# Altium PCB main.PcbDoc (part 6 of 16)
Units mil, origin at the board's own origin, x right, y up, seen from the top; angles counter-clockwise.
Board outline 8394.75 x 5164.44 mil, 7 copper layers (Top Layer 1, Layer 2, Layer 3, Unused, Layer 4_pow, Layer 5_gnd, Bottom 6+gnd), stack 64.043 mil thick; 364 components, 409 nets, 1932 pads, 1061 vias.
Unrouted connection lines stored in the file: 2.
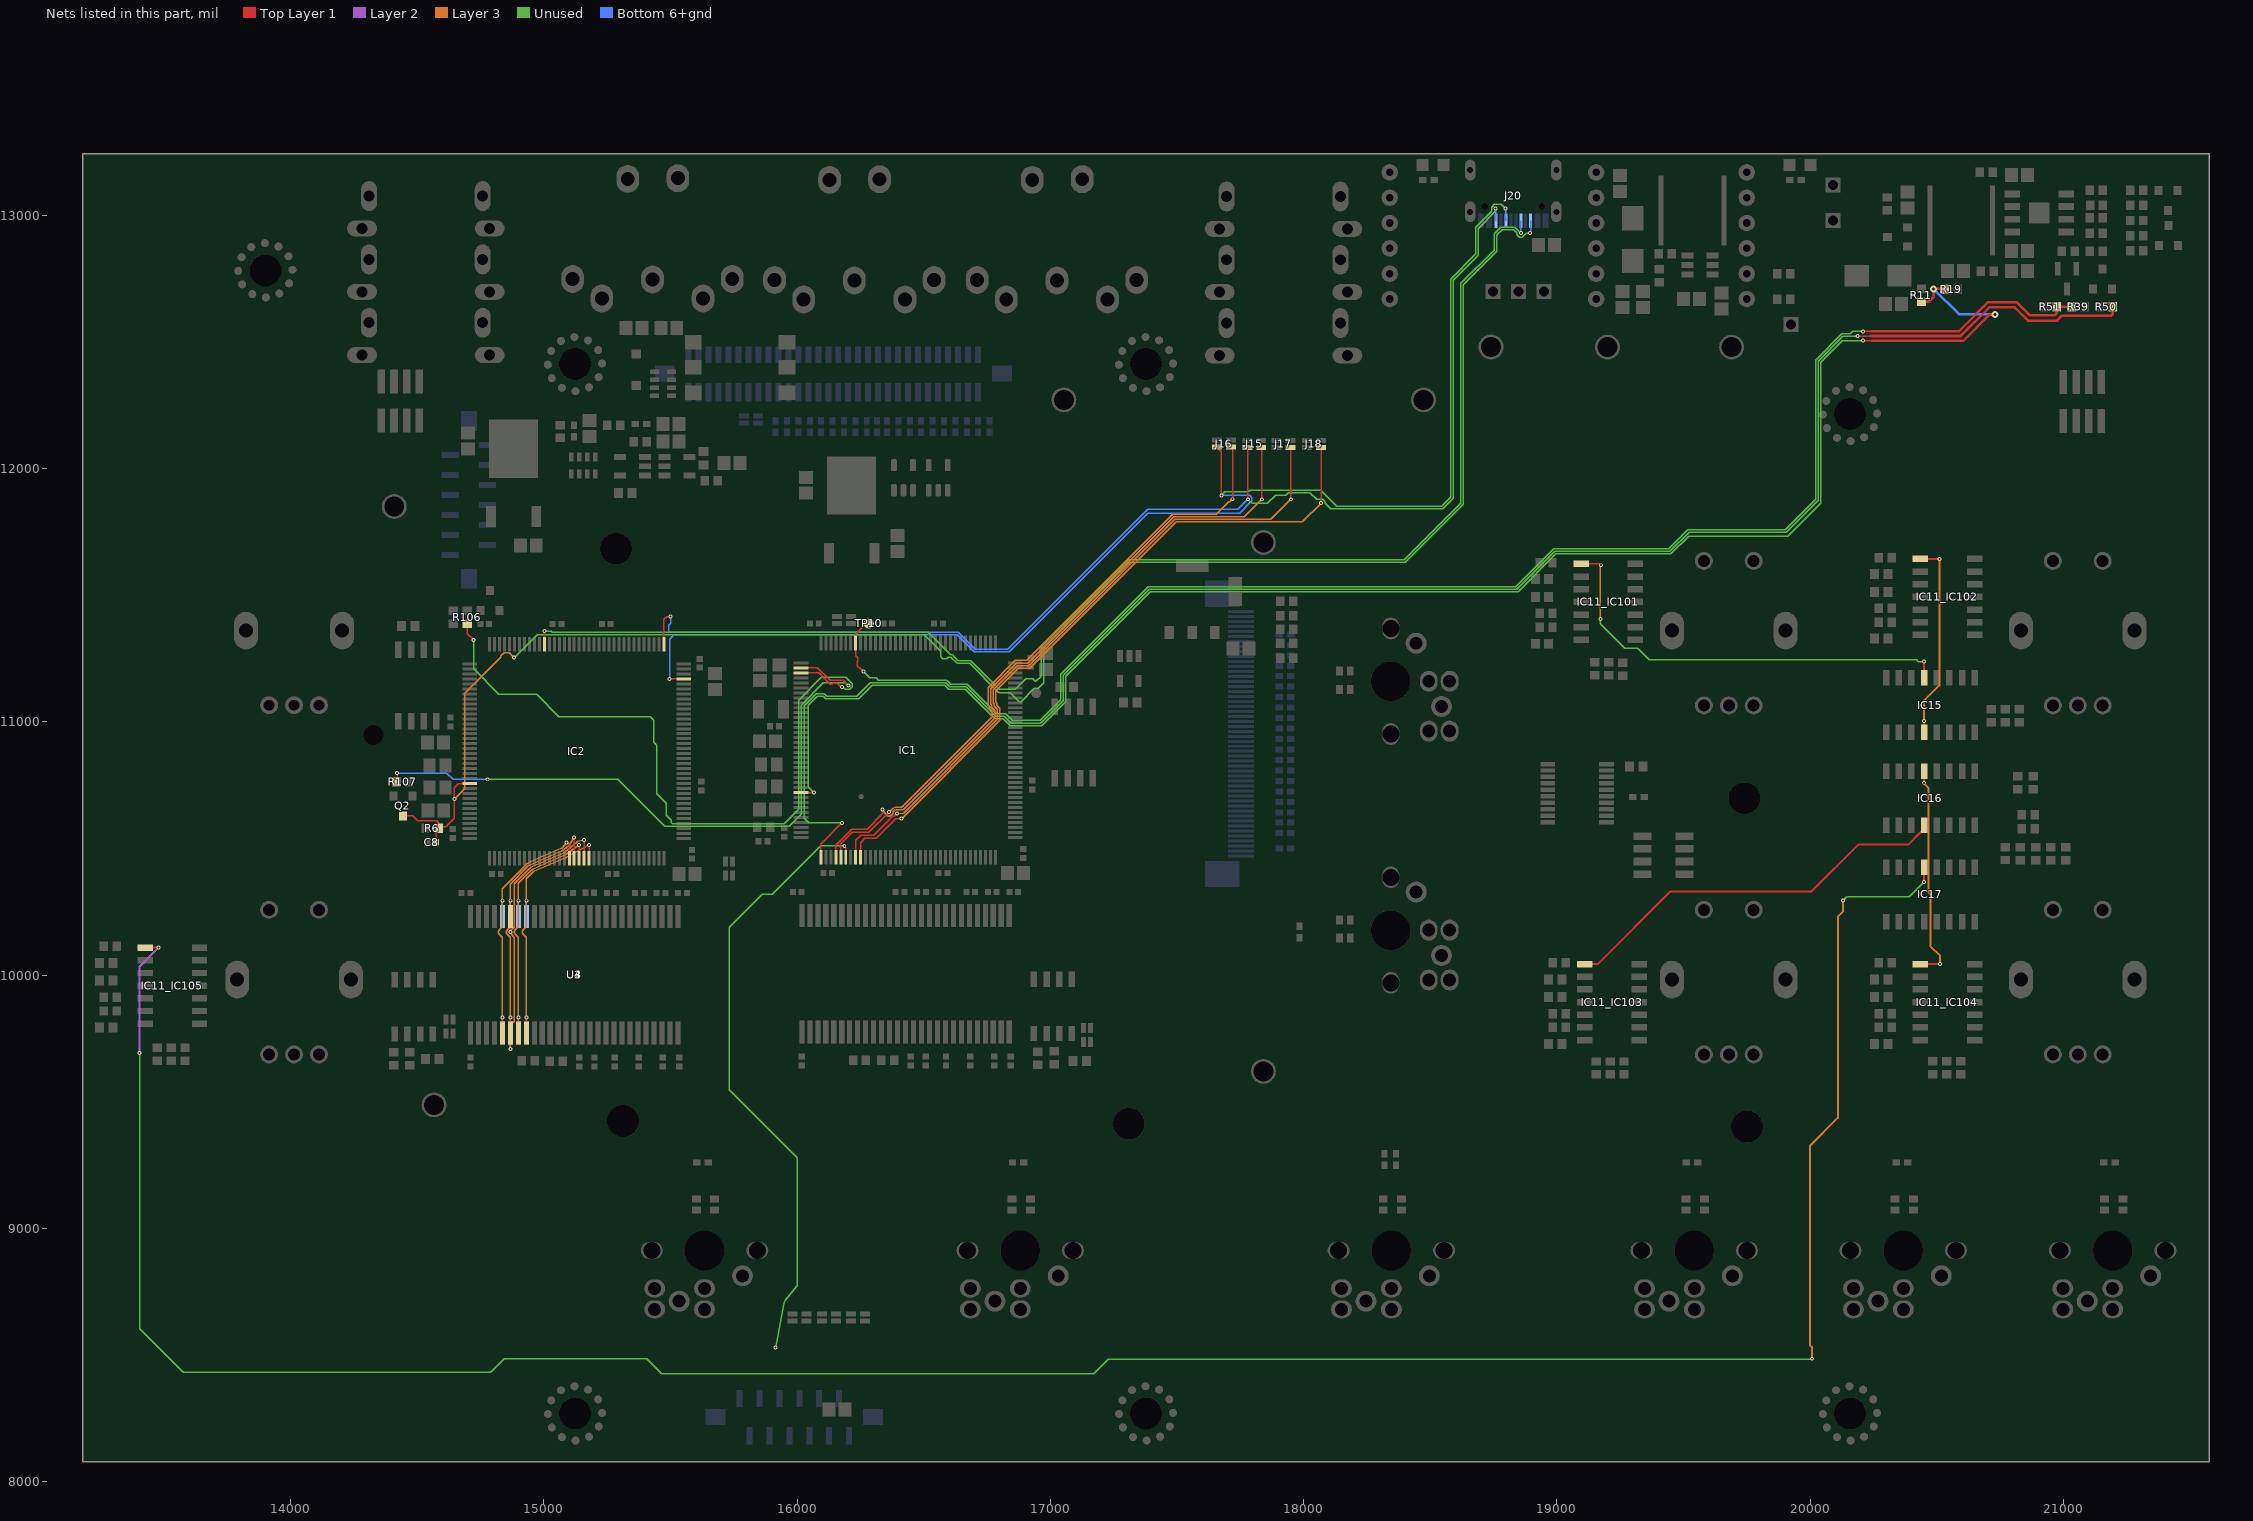
[diagram p9: the nets of this part, all layers, seen from the top]

## Via types
v1: diameter 15.75, hole 7.87, Top Layer 1 to Bottom 6+gnd, tented both sides, 961 vias
v2: diameter 27.56, hole 11.81, Top Layer 1 to Bottom 6+gnd, 45 vias
v3: diameter 23.62/23.62/23.62/23.62/23.62/23.62/23.62 (per signal layer), hole 12, Top Layer 1 to Bottom 6+gnd, tented top, 42 vias
v4: diameter 15.75, hole 7.87, Top Layer 1 to Bottom 6+gnd, 10 vias
v5: diameter 23.62/23.62/23.62/23.62/23.62/23.62/23.62 (per signal layer), hole 12, Top Layer 1 to Bottom 6+gnd, tented bottom, 3 vias

## Nets (pads, with @x,y where several pads share a name; then routed paths per layer and width w, separated by ;. In a path a pad name is that pad's centre, name@x,y a point inside that pad or via, vN(x,y) a via of type N, cw(c..) or ccw(c..) an arc to the next point about the centre after c; other vN are vias at no path point) (continued)
AA7: IC2.53 U3.32 U4.32 | length 1309.9
  Top Layer 1 w5: U3.32@14836.39,9771.46 v1@14836.39,9833.49 ; v1(15089.85,10524.63) 15100.09,10514.39 15100.09,10462.11 IC2.53@15100.32,10461.87
  Layer 3 w5: v1(14836.63,9833.49) 14836.63,10145.64 ; 14836.63,10195.56 14836.63,10293.63 v1(14836.14,10294.12) 14836.14,10340.73 ; v1(15089.85,10524.63) 15073.95,10504.96 ; 14835.17,10149.12 cw(c14831.63,10145.59) 14836.63,10145.68 ; 14835.17,10149.12 cw(c14831.63,10145.59) 14836.63,10145.68 ; 14835.17,10149.12 cw(c14831.63,10145.59) 14836.63,10145.68 ; 14835.17,10149.12 cw(c14831.63,10145.59) 14836.63,10145.68 ; 14835.17,10149.12 cw(c14831.63,10145.59) 14836.63,10145.68 ; 14835.17,10149.12 cw(c14831.63,10145.59) 14836.63,10145.68 ; 14835.17,10149.12 cw(c14831.63,10145.59) 14836.63,10145.68 ; 14835.17,10149.12 cw(c14831.63,10145.59) 14836.63,10145.68 ; 14835.17,10149.12 cw(c14831.63,10145.59) 14836.63,10145.68 ; 14835.17,10149.12 cw(c14831.63,10145.59) 14836.63,10145.68 ; 14835.17,10149.12 cw(c14831.63,10145.59) 14836.63,10145.68 ; 14835.17,10149.12 cw(c14831.63,10145.59) 14836.63,10145.68 ; 14835.17,10149.12 cw(c14831.63,10145.59) 14836.63,10145.68 ; 14835.17,10149.12 cw(c14831.63,10145.59) 14836.63,10145.68 ; 14835.17,10149.12 cw(c14831.63,10145.59) 14836.63,10145.68 ; 14835.17,10149.12 cw(c14831.63,10145.59) 14836.63,10145.68 ; 14835.17,10149.12 14825.25,10159.1 cw(c14836.14,10169.94) 14824.62,10180.12 14835.38,10192.29 ; 14835.38,10192.29 ccw(c14831.63,10195.6) 14836.63,10195.51 ; 14835.38,10192.29 ccw(c14831.63,10195.6) 14836.63,10195.51 ; 14835.38,10192.29 ccw(c14831.63,10195.6) 14836.63,10195.51 ; 14835.38,10192.29 ccw(c14831.63,10195.6) 14836.63,10195.51 ; 14835.38,10192.29 ccw(c14831.63,10195.6) 14836.63,10195.51 ; 14835.38,10192.29 ccw(c14831.63,10195.6) 14836.63,10195.51 ; 14835.38,10192.29 ccw(c14831.63,10195.6) 14836.63,10195.51 ; 14835.38,10192.29 ccw(c14831.63,10195.6) 14836.63,10195.51 ; 14835.38,10192.29 ccw(c14831.63,10195.6) 14836.63,10195.51 ; 14835.38,10192.29 ccw(c14831.63,10195.6) 14836.63,10195.51 ; 14835.38,10192.29 ccw(c14831.63,10195.6) 14836.63,10195.51 ; 14835.38,10192.29 ccw(c14831.63,10195.6) 14836.63,10195.51 ; 14835.38,10192.29 ccw(c14831.63,10195.6) 14836.63,10195.51 ; 14835.38,10192.29 ccw(c14831.63,10195.6) 14836.63,10195.51 ; 14835.38,10192.29 ccw(c14831.63,10195.6) 14836.63,10195.51 ; 14835.38,10192.29 ccw(c14831.63,10195.6) 14836.63,10195.51 ; 14836.14,10340.73 cw(c14841.14,10340.73) 14837.59,10344.25 ; 14836.14,10340.73 cw(c14841.14,10340.73) 14837.59,10344.25 ; 14836.14,10340.73 cw(c14841.14,10340.73) 14837.59,10344.25 ; 14836.14,10340.73 cw(c14841.14,10340.73) 14837.59,10344.25 ; 14836.14,10340.73 cw(c14841.14,10340.73) 14837.59,10344.25 ; 14836.14,10340.73 cw(c14841.14,10340.73) 14837.59,10344.25 ; 14836.14,10340.73 cw(c14841.14,10340.73) 14837.59,10344.25 ; 14836.14,10340.73 cw(c14841.14,10340.73) 14837.59,10344.25 ; 14836.14,10340.73 cw(c14841.14,10340.73) 14837.59,10344.25 ; 14836.14,10340.73 cw(c14841.14,10340.73) 14837.59,10344.25 ; 14836.14,10340.73 cw(c14841.14,10340.73) 14837.59,10344.25 ; 14836.14,10340.73 cw(c14841.14,10340.73) 14837.59,10344.25 ; 14836.14,10340.73 cw(c14841.14,10340.73) 14837.59,10344.25 ; 14836.14,10340.73 cw(c14841.14,10340.73) 14837.59,10344.25 ; 14836.14,10340.73 cw(c14841.14,10340.73) 14837.59,10344.25 ; 14836.14,10340.73 cw(c14841.14,10340.73) 14837.59,10344.25 ; 14837.59,10344.25 14928.34,10435 cw(c14967.12,10396.01) 14944.35,10446.07 14994.57,10468.92 cw(c15021.64,10409.41) 14995.83,10469.47 15068.06,10500.5 ; 15068.06,10500.5 ccw(c15062,10514.63) 15073.95,10504.96 ; 15068.06,10500.5 ccw(c15062,10514.63) 15073.95,10504.96 ; 15068.06,10500.5 ccw(c15062,10514.63) 15073.95,10504.96 ; 15068.06,10500.5 ccw(c15062,10514.63) 15073.95,10504.96 ; 15068.06,10500.5 ccw(c15062,10514.63) 15073.95,10504.96 ; 15068.06,10500.5 ccw(c15062,10514.63) 15073.95,10504.96 ; 15068.06,10500.5 ccw(c15062,10514.63) 15073.95,10504.96 ; 15068.06,10500.5 ccw(c15062,10514.63) 15073.95,10504.96 ; 15068.06,10500.5 ccw(c15062,10514.63) 15073.95,10504.96 ; 15068.06,10500.5 ccw(c15062,10514.63) 15073.95,10504.96 ; 15068.06,10500.5 ccw(c15062,10514.63) 15073.95,10504.96 ; 15068.06,10500.5 ccw(c15062,10514.63) 15073.95,10504.96 ; 15068.06,10500.5 ccw(c15062,10514.63) 15073.95,10504.96 ; 15068.06,10500.5 ccw(c15062,10514.63) 15073.95,10504.96 ; 15068.06,10500.5 ccw(c15062,10514.63) 15073.95,10504.96 ; 15068.06,10500.5 ccw(c15062,10514.63) 15073.95,10504.96
  Bottom 6+gnd w5: U4.32@14836.39,10232.03 v1@14836.39,10293.87
AA8: IC2.54 U3.33 U4.33 | length 1491.1
  Top Layer 1 w5: U3.33@14867.88,9771.4 v1@14867.88,9833.24 ; v1(15119.85,10544.63) 15119.93,10544.55 15119.93,10461.95 IC2.54@15120.01,10461.87
  Layer 3 w5: v1(14868.13,9833.49) 14868.13,10145.64 ; 14868.13,10195.56 14868.13,10293.63 v1(14867.64,10294.12) 14867.64,10358.09 ; v1(15119.85,10544.63) 15103.02,10516.69 cw(c15089.85,10524.63) 15099.63,10512.77 15078.13,10495.05 cw(c15062,10514.63) 15072.01,10491.31 14999.83,10460.31 ; 14866.67,10149.12 cw(c14863.13,10145.59) 14868.13,10145.68 ; 14866.67,10149.12 cw(c14863.13,10145.59) 14868.13,10145.68 ; 14866.67,10149.12 cw(c14863.13,10145.59) 14868.13,10145.68 ; 14866.67,10149.12 cw(c14863.13,10145.59) 14868.13,10145.68 ; 14866.67,10149.12 cw(c14863.13,10145.59) 14868.13,10145.68 ; 14866.67,10149.12 cw(c14863.13,10145.59) 14868.13,10145.68 ; 14866.67,10149.12 cw(c14863.13,10145.59) 14868.13,10145.68 ; 14866.67,10149.12 cw(c14863.13,10145.59) 14868.13,10145.68 ; 14866.67,10149.12 cw(c14863.13,10145.59) 14868.13,10145.68 ; 14866.67,10149.12 cw(c14863.13,10145.59) 14868.13,10145.68 ; 14866.67,10149.12 cw(c14863.13,10145.59) 14868.13,10145.68 ; 14866.67,10149.12 cw(c14863.13,10145.59) 14868.13,10145.68 ; 14866.67,10149.12 cw(c14863.13,10145.59) 14868.13,10145.68 ; 14866.67,10149.12 cw(c14863.13,10145.59) 14868.13,10145.68 ; 14866.67,10149.12 cw(c14863.13,10145.59) 14868.13,10145.68 ; 14866.67,10149.12 cw(c14863.13,10145.59) 14868.13,10145.68 ; 14866.67,10149.12 14856.74,10159.1 cw(c14867.64,10169.94) 14856.11,10180.12 14866.87,10192.29 ; 14866.87,10192.29 ccw(c14863.13,10195.6) 14868.13,10195.51 ; 14866.87,10192.29 ccw(c14863.13,10195.6) 14868.13,10195.51 ; 14866.87,10192.29 ccw(c14863.13,10195.6) 14868.13,10195.51 ; 14866.87,10192.29 ccw(c14863.13,10195.6) 14868.13,10195.51 ; 14866.87,10192.29 ccw(c14863.13,10195.6) 14868.13,10195.51 ; 14866.87,10192.29 ccw(c14863.13,10195.6) 14868.13,10195.51 ; 14866.87,10192.29 ccw(c14863.13,10195.6) 14868.13,10195.51 ; 14866.87,10192.29 ccw(c14863.13,10195.6) 14868.13,10195.51 ; 14866.87,10192.29 ccw(c14863.13,10195.6) 14868.13,10195.51 ; 14866.87,10192.29 ccw(c14863.13,10195.6) 14868.13,10195.51 ; 14866.87,10192.29 ccw(c14863.13,10195.6) 14868.13,10195.51 ; 14866.87,10192.29 ccw(c14863.13,10195.6) 14868.13,10195.51 ; 14866.87,10192.29 ccw(c14863.13,10195.6) 14868.13,10195.51 ; 14866.87,10192.29 ccw(c14863.13,10195.6) 14868.13,10195.51 ; 14866.87,10192.29 ccw(c14863.13,10195.6) 14868.13,10195.51 ; 14866.87,10192.29 ccw(c14863.13,10195.6) 14868.13,10195.51 ; 14867.64,10358.09 cw(c14872.64,10358.09) 14869.08,10361.6 ; 14867.64,10358.09 cw(c14872.64,10358.09) 14869.08,10361.6 ; 14867.64,10358.09 cw(c14872.64,10358.09) 14869.08,10361.6 ; 14867.64,10358.09 cw(c14872.64,10358.09) 14869.08,10361.6 ; 14867.64,10358.09 cw(c14872.64,10358.09) 14869.08,10361.6 ; 14867.64,10358.09 cw(c14872.64,10358.09) 14869.08,10361.6 ; 14867.64,10358.09 cw(c14872.64,10358.09) 14869.08,10361.6 ; 14867.64,10358.09 cw(c14872.64,10358.09) 14869.08,10361.6 ; 14867.64,10358.09 cw(c14872.64,10358.09) 14869.08,10361.6 ; 14867.64,10358.09 cw(c14872.64,10358.09) 14869.08,10361.6 ; 14867.64,10358.09 cw(c14872.64,10358.09) 14869.08,10361.6 ; 14867.64,10358.09 cw(c14872.64,10358.09) 14869.08,10361.6 ; 14867.64,10358.09 cw(c14872.64,10358.09) 14869.08,10361.6 ; 14867.64,10358.09 cw(c14872.64,10358.09) 14869.08,10361.6 ; 14867.64,10358.09 cw(c14872.64,10358.09) 14869.08,10361.6 ; 14867.64,10358.09 cw(c14872.64,10358.09) 14869.08,10361.6 ; 14869.08,10361.6 14935.39,10427.91 ; 14935.39,10427.91 cw(c14967.12,10396.01) 14948.49,10436.97 ; 14935.39,10427.91 cw(c14967.12,10396.01) 14948.49,10436.97 ; 14935.39,10427.91 cw(c14967.12,10396.01) 14948.49,10436.97 ; 14935.39,10427.91 cw(c14967.12,10396.01) 14948.49,10436.97 ; 14935.39,10427.91 cw(c14967.12,10396.01) 14948.49,10436.97 ; 14935.39,10427.91 cw(c14967.12,10396.01) 14948.49,10436.97 ; 14935.39,10427.91 cw(c14967.12,10396.01) 14948.49,10436.97 ; 14935.39,10427.91 cw(c14967.12,10396.01) 14948.49,10436.97 ; 14935.39,10427.91 cw(c14967.12,10396.01) 14948.49,10436.97 ; 14935.39,10427.91 cw(c14967.12,10396.01) 14948.49,10436.97 ; 14935.39,10427.91 cw(c14967.12,10396.01) 14948.49,10436.97 ; 14935.39,10427.91 cw(c14967.12,10396.01) 14948.49,10436.97 ; 14935.39,10427.91 cw(c14967.12,10396.01) 14948.49,10436.97 ; 14935.39,10427.91 cw(c14967.12,10396.01) 14948.49,10436.97 ; 14935.39,10427.91 cw(c14967.12,10396.01) 14948.49,10436.97 ; 14935.39,10427.91 cw(c14967.12,10396.01) 14948.49,10436.97 ; 14948.49,10436.97 14998.71,10459.81 ; 14998.71,10459.81 cw(c15021.64,10409.41) 14999.83,10460.31 ; 14998.71,10459.81 cw(c15021.64,10409.41) 14999.83,10460.31 ; 14998.71,10459.81 cw(c15021.64,10409.41) 14999.83,10460.31 ; 14998.71,10459.81 cw(c15021.64,10409.41) 14999.83,10460.31 ; 14998.71,10459.81 cw(c15021.64,10409.41) 14999.83,10460.31 ; 14998.71,10459.81 cw(c15021.64,10409.41) 14999.83,10460.31 ; 14998.71,10459.81 cw(c15021.64,10409.41) 14999.83,10460.31 ; 14998.71,10459.81 cw(c15021.64,10409.41) 14999.83,10460.31 ; 14998.71,10459.81 cw(c15021.64,10409.41) 14999.83,10460.31 ; 14998.71,10459.81 cw(c15021.64,10409.41) 14999.83,10460.31 ; 14998.71,10459.81 cw(c15021.64,10409.41) 14999.83,10460.31 ; 14998.71,10459.81 cw(c15021.64,10409.41) 14999.83,10460.31 ; 14998.71,10459.81 cw(c15021.64,10409.41) 14999.83,10460.31 ; 14998.71,10459.81 cw(c15021.64,10409.41) 14999.83,10460.31 ; 14998.71,10459.81 cw(c15021.64,10409.41) 14999.83,10460.31 ; 14998.71,10459.81 cw(c15021.64,10409.41) 14999.83,10460.31
  Bottom 6+gnd w5: U4.33@14867.88,10232.03 v1@14867.88,10293.87
AA9: IC2.55 U3.34 U4.34 | length 1334.1
  Top Layer 1 w5: U3.34@14899.38,9771.46 v1@14899.38,9833.49 ; IC2.55@15139.69,10461.87 v1@15139.69,10514.16
  Layer 3 w5: v1(14899.62,9833.49) 14899.62,10145.64 ; 14899.62,10195.56 14899.62,10293.63 v1(14899.13,10294.12) 14899.13,10361.3 ; v1(15139.46,10514.39) 15088.46,10477.77 ; 14898.17,10149.12 cw(c14894.62,10145.59) 14899.62,10145.68 ; 14898.17,10149.12 cw(c14894.62,10145.59) 14899.62,10145.68 ; 14898.17,10149.12 cw(c14894.62,10145.59) 14899.62,10145.68 ; 14898.17,10149.12 cw(c14894.62,10145.59) 14899.62,10145.68 ; 14898.17,10149.12 cw(c14894.62,10145.59) 14899.62,10145.68 ; 14898.17,10149.12 cw(c14894.62,10145.59) 14899.62,10145.68 ; 14898.17,10149.12 cw(c14894.62,10145.59) 14899.62,10145.68 ; 14898.17,10149.12 cw(c14894.62,10145.59) 14899.62,10145.68 ; 14898.17,10149.12 cw(c14894.62,10145.59) 14899.62,10145.68 ; 14898.17,10149.12 cw(c14894.62,10145.59) 14899.62,10145.68 ; 14898.17,10149.12 cw(c14894.62,10145.59) 14899.62,10145.68 ; 14898.17,10149.12 cw(c14894.62,10145.59) 14899.62,10145.68 ; 14898.17,10149.12 cw(c14894.62,10145.59) 14899.62,10145.68 ; 14898.17,10149.12 cw(c14894.62,10145.59) 14899.62,10145.68 ; 14898.17,10149.12 cw(c14894.62,10145.59) 14899.62,10145.68 ; 14898.17,10149.12 cw(c14894.62,10145.59) 14899.62,10145.68 ; 14898.17,10149.12 14888.24,10159.1 cw(c14899.13,10169.94) 14887.61,10180.12 14898.37,10192.29 ; 14898.37,10192.29 ccw(c14894.62,10195.6) 14899.62,10195.51 ; 14898.37,10192.29 ccw(c14894.62,10195.6) 14899.62,10195.51 ; 14898.37,10192.29 ccw(c14894.62,10195.6) 14899.62,10195.51 ; 14898.37,10192.29 ccw(c14894.62,10195.6) 14899.62,10195.51 ; 14898.37,10192.29 ccw(c14894.62,10195.6) 14899.62,10195.51 ; 14898.37,10192.29 ccw(c14894.62,10195.6) 14899.62,10195.51 ; 14898.37,10192.29 ccw(c14894.62,10195.6) 14899.62,10195.51 ; 14898.37,10192.29 ccw(c14894.62,10195.6) 14899.62,10195.51 ; 14898.37,10192.29 ccw(c14894.62,10195.6) 14899.62,10195.51 ; 14898.37,10192.29 ccw(c14894.62,10195.6) 14899.62,10195.51 ; 14898.37,10192.29 ccw(c14894.62,10195.6) 14899.62,10195.51 ; 14898.37,10192.29 ccw(c14894.62,10195.6) 14899.62,10195.51 ; 14898.37,10192.29 ccw(c14894.62,10195.6) 14899.62,10195.51 ; 14898.37,10192.29 ccw(c14894.62,10195.6) 14899.62,10195.51 ; 14898.37,10192.29 ccw(c14894.62,10195.6) 14899.62,10195.51 ; 14898.37,10192.29 ccw(c14894.62,10195.6) 14899.62,10195.51 ; 14899.13,10361.3 cw(c14904.13,10361.3) 14900.58,10364.82 ; 14899.13,10361.3 cw(c14904.13,10361.3) 14900.58,10364.82 ; 14899.13,10361.3 cw(c14904.13,10361.3) 14900.58,10364.82 ; 14899.13,10361.3 cw(c14904.13,10361.3) 14900.58,10364.82 ; 14899.13,10361.3 cw(c14904.13,10361.3) 14900.58,10364.82 ; 14899.13,10361.3 cw(c14904.13,10361.3) 14900.58,10364.82 ; 14899.13,10361.3 cw(c14904.13,10361.3) 14900.58,10364.82 ; 14899.13,10361.3 cw(c14904.13,10361.3) 14900.58,10364.82 ; 14899.13,10361.3 cw(c14904.13,10361.3) 14900.58,10364.82 ; 14899.13,10361.3 cw(c14904.13,10361.3) 14900.58,10364.82 ; 14899.13,10361.3 cw(c14904.13,10361.3) 14900.58,10364.82 ; 14899.13,10361.3 cw(c14904.13,10361.3) 14900.58,10364.82 ; 14899.13,10361.3 cw(c14904.13,10361.3) 14900.58,10364.82 ; 14899.13,10361.3 cw(c14904.13,10361.3) 14900.58,10364.82 ; 14899.13,10361.3 cw(c14904.13,10361.3) 14900.58,10364.82 ; 14899.13,10361.3 cw(c14904.13,10361.3) 14900.58,10364.82 ; 14900.58,10364.82 14949.5,10413.74 cw(c14967.12,10396.01) 14956.79,10418.77 15006.96,10441.59 ; 15006.96,10441.59 cw(c15021.64,10409.41) 15007.77,10441.95 ; 15006.96,10441.59 cw(c15021.64,10409.41) 15007.77,10441.95 ; 15006.96,10441.59 cw(c15021.64,10409.41) 15007.77,10441.95 ; 15006.96,10441.59 cw(c15021.64,10409.41) 15007.77,10441.95 ; 15006.96,10441.59 cw(c15021.64,10409.41) 15007.77,10441.95 ; 15006.96,10441.59 cw(c15021.64,10409.41) 15007.77,10441.95 ; 15006.96,10441.59 cw(c15021.64,10409.41) 15007.77,10441.95 ; 15006.96,10441.59 cw(c15021.64,10409.41) 15007.77,10441.95 ; 15006.96,10441.59 cw(c15021.64,10409.41) 15007.77,10441.95 ; 15006.96,10441.59 cw(c15021.64,10409.41) 15007.77,10441.95 ; 15006.96,10441.59 cw(c15021.64,10409.41) 15007.77,10441.95 ; 15006.96,10441.59 cw(c15021.64,10409.41) 15007.77,10441.95 ; 15006.96,10441.59 cw(c15021.64,10409.41) 15007.77,10441.95 ; 15006.96,10441.59 cw(c15021.64,10409.41) 15007.77,10441.95 ; 15006.96,10441.59 cw(c15021.64,10409.41) 15007.77,10441.95 ; 15006.95,10441.59 cw(c15021.64,10409.41) 15007.77,10441.95 ; 15007.77,10441.95 15079.9,10472.94 ; 15079.9,10472.94 ccw(c15062,10514.63) 15088.46,10477.77 ; 15079.9,10472.94 ccw(c15062,10514.63) 15088.46,10477.77 ; 15079.9,10472.94 ccw(c15062,10514.63) 15088.46,10477.77 ; 15079.9,10472.94 ccw(c15062,10514.63) 15088.46,10477.77 ; 15079.9,10472.94 ccw(c15062,10514.63) 15088.46,10477.77 ; 15079.9,10472.94 ccw(c15062,10514.63) 15088.46,10477.77 ; 15079.9,10472.94 ccw(c15062,10514.63) 15088.46,10477.77 ; 15079.9,10472.94 ccw(c15062,10514.63) 15088.46,10477.77 ; 15079.9,10472.94 ccw(c15062,10514.63) 15088.46,10477.77 ; 15079.9,10472.94 ccw(c15062,10514.63) 15088.46,10477.77 ; 15079.9,10472.94 ccw(c15062,10514.63) 15088.46,10477.77 ; 15079.9,10472.94 ccw(c15062,10514.63) 15088.46,10477.77 ; 15079.9,10472.94 ccw(c15062,10514.63) 15088.46,10477.77 ; 15079.9,10472.94 ccw(c15062,10514.63) 15088.46,10477.77 ; 15079.9,10472.94 ccw(c15062,10514.63) 15088.46,10477.77 ; 15079.9,10472.94 ccw(c15062,10514.63) 15088.46,10477.77
  Bottom 6+gnd w5: U4.34@14899.38,10232.03 v1@14899.38,10293.87
AA10: IC2.56 U3.22 U4.22 | length 1723.1
  Top Layer 1 w5: v1@14867.88,10170.19 U3.22@14867.88,10232.03 ; IC2.56@15159.54,10461.71 v1@15159.54,10534.31
  Layer 3 w5: v1(14867.64,9709.31) 14867.64,9803 14883.76,9819.12 14883.76,10145.78 ; v1(14867.64,10169.94) ccw(c14871.79,10172.73) 14867.72,10169.82 14882.83,10148.64 ; v1@14867.64,10175.64 14867.64,10175.51 cw(c14871.79,10172.73) 14868.22,10176.22 14882.3,10190.35 ; 14883.76,10193.83 14883.76,10360.07 ; v1(15159.46,10534.39) 15136.24,10529.43 ccw(c15139.46,10514.39) 15129.19,10525.84 15106.8,10505.74 ; 14882.3,10190.35 ccw(c14878.76,10193.88) 14883.76,10193.79 ; 14882.3,10190.35 ccw(c14878.76,10193.88) 14883.76,10193.79 ; 14882.3,10190.35 ccw(c14878.76,10193.88) 14883.76,10193.79 ; 14882.3,10190.35 ccw(c14878.76,10193.88) 14883.76,10193.79 ; 14882.3,10190.35 ccw(c14878.76,10193.88) 14883.76,10193.79 ; 14882.3,10190.35 ccw(c14878.76,10193.88) 14883.76,10193.79 ; 14882.3,10190.35 ccw(c14878.76,10193.88) 14883.76,10193.79 ; 14882.3,10190.35 ccw(c14878.76,10193.88) 14883.76,10193.79 ; 14882.3,10190.35 ccw(c14878.76,10193.88) 14883.76,10193.79 ; 14882.3,10190.35 ccw(c14878.76,10193.88) 14883.76,10193.79 ; 14882.3,10190.35 ccw(c14878.76,10193.88) 14883.76,10193.79 ; 14882.3,10190.35 ccw(c14878.76,10193.88) 14883.76,10193.79 ; 14882.3,10190.35 ccw(c14878.76,10193.88) 14883.76,10193.79 ; 14882.3,10190.35 ccw(c14878.76,10193.88) 14883.76,10193.79 ; 14882.3,10190.35 ccw(c14878.76,10193.88) 14883.76,10193.79 ; 14882.3,10190.35 ccw(c14878.76,10193.88) 14883.76,10193.79 ; 14882.83,10148.64 cw(c14878.76,10145.74) 14883.76,10145.83 ; 14882.83,10148.64 cw(c14878.76,10145.74) 14883.76,10145.83 ; 14882.83,10148.64 cw(c14878.76,10145.74) 14883.76,10145.83 ; 14882.83,10148.64 cw(c14878.76,10145.74) 14883.76,10145.83 ; 14882.83,10148.64 cw(c14878.76,10145.74) 14883.76,10145.83 ; 14882.83,10148.64 cw(c14878.76,10145.74) 14883.76,10145.83 ; 14882.83,10148.64 cw(c14878.76,10145.74) 14883.76,10145.83 ; 14882.83,10148.64 cw(c14878.76,10145.74) 14883.76,10145.83 ; 14882.83,10148.64 cw(c14878.76,10145.74) 14883.76,10145.83 ; 14882.83,10148.64 cw(c14878.76,10145.74) 14883.76,10145.83 ; 14882.83,10148.64 cw(c14878.76,10145.74) 14883.76,10145.83 ; 14882.83,10148.64 cw(c14878.76,10145.74) 14883.76,10145.83 ; 14882.83,10148.64 cw(c14878.76,10145.74) 14883.76,10145.83 ; 14882.83,10148.64 cw(c14878.76,10145.74) 14883.76,10145.83 ; 14882.83,10148.64 cw(c14878.76,10145.74) 14883.76,10145.83 ; 14882.83,10148.64 cw(c14878.76,10145.74) 14883.76,10145.83 ; 14883.76,10360.07 cw(c14888.76,10360.07) 14885.2,10363.58 ; 14883.76,10360.07 cw(c14888.76,10360.07) 14885.2,10363.58 ; 14883.76,10360.07 cw(c14888.76,10360.07) 14885.2,10363.58 ; 14883.76,10360.07 cw(c14888.76,10360.07) 14885.2,10363.58 ; 14883.76,10360.07 cw(c14888.76,10360.07) 14885.2,10363.58 ; 14883.76,10360.07 cw(c14888.76,10360.07) 14885.2,10363.58 ; 14883.76,10360.07 cw(c14888.76,10360.07) 14885.2,10363.58 ; 14883.76,10360.07 cw(c14888.76,10360.07) 14885.2,10363.58 ; 14883.76,10360.07 cw(c14888.76,10360.07) 14885.2,10363.58 ; 14883.76,10360.07 cw(c14888.76,10360.07) 14885.2,10363.58 ; 14883.76,10360.07 cw(c14888.76,10360.07) 14885.2,10363.58 ; 14883.76,10360.07 cw(c14888.76,10360.07) 14885.2,10363.58 ; 14883.76,10360.07 cw(c14888.76,10360.07) 14885.2,10363.58 ; 14883.76,10360.07 cw(c14888.76,10360.07) 14885.2,10363.58 ; 14883.76,10360.07 cw(c14888.76,10360.07) 14885.2,10363.58 ; 14883.76,10360.07 cw(c14888.76,10360.07) 14885.2,10363.58 ; 14885.2,10363.58 14942.45,10420.83 ; 14942.45,10420.83 cw(c14967.12,10396.01) 14952.68,10427.89 ; 14942.45,10420.83 cw(c14967.12,10396.01) 14952.68,10427.89 ; 14942.45,10420.83 cw(c14967.12,10396.01) 14952.68,10427.89 ; 14942.45,10420.83 cw(c14967.12,10396.01) 14952.68,10427.89 ; 14942.45,10420.83 cw(c14967.12,10396.01) 14952.68,10427.89 ; 14942.45,10420.83 cw(c14967.12,10396.01) 14952.68,10427.89 ; 14942.45,10420.83 cw(c14967.12,10396.01) 14952.68,10427.89 ; 14942.45,10420.83 cw(c14967.12,10396.01) 14952.68,10427.89 ; 14942.45,10420.83 cw(c14967.12,10396.01) 14952.68,10427.89 ; 14942.45,10420.83 cw(c14967.12,10396.01) 14952.68,10427.89 ; 14942.45,10420.83 cw(c14967.12,10396.01) 14952.68,10427.89 ; 14942.45,10420.83 cw(c14967.12,10396.01) 14952.68,10427.89 ; 14942.45,10420.83 cw(c14967.12,10396.01) 14952.68,10427.89 ; 14942.45,10420.83 cw(c14967.12,10396.01) 14952.68,10427.89 ; 14942.45,10420.83 cw(c14967.12,10396.01) 14952.68,10427.89 ; 14942.45,10420.83 cw(c14967.12,10396.01) 14952.68,10427.89 ; 14952.68,10427.89 15002.85,10450.71 ; 15002.85,10450.71 cw(c15021.64,10409.41) 15003.8,10451.13 ; 15002.85,10450.71 cw(c15021.64,10409.41) 15003.8,10451.13 ; 15002.85,10450.71 cw(c15021.64,10409.41) 15003.79,10451.13 ; 15002.85,10450.71 cw(c15021.64,10409.41) 15003.79,10451.13 ; 15002.85,10450.71 cw(c15021.64,10409.41) 15003.79,10451.13 ; 15002.85,10450.71 cw(c15021.64,10409.41) 15003.79,10451.13 ; 15002.85,10450.71 cw(c15021.64,10409.41) 15003.79,10451.13 ; 15002.85,10450.71 cw(c15021.64,10409.41) 15003.79,10451.13 ; 15002.85,10450.71 cw(c15021.64,10409.41) 15003.79,10451.13 ; 15002.85,10450.71 cw(c15021.64,10409.41) 15003.79,10451.13 ; 15002.85,10450.71 cw(c15021.64,10409.41) 15003.79,10451.13 ; 15002.85,10450.71 cw(c15021.64,10409.41) 15003.79,10451.13 ; 15002.85,10450.71 cw(c15021.64,10409.41) 15003.79,10451.13 ; 15002.85,10450.71 cw(c15021.64,10409.41) 15003.79,10451.13 ; 15002.85,10450.71 cw(c15021.64,10409.41) 15003.79,10451.13 ; 15002.85,10450.71 cw(c15021.64,10409.41) 15003.79,10451.13 ; 15003.8,10451.13 15075.96,10482.13 ; 15075.96,10482.13 ccw(c15062,10514.63) 15084.49,10487.33 ; 15075.96,10482.13 ccw(c15062,10514.63) 15084.49,10487.33 ; 15075.96,10482.13 ccw(c15062,10514.63) 15084.49,10487.33 ; 15075.96,10482.13 ccw(c15062,10514.63) 15084.49,10487.33 ; 15075.96,10482.13 ccw(c15062,10514.63) 15084.49,10487.33 ; 15075.96,10482.13 ccw(c15062,10514.63) 15084.49,10487.33 ; 15075.96,10482.13 ccw(c15062,10514.63) 15084.49,10487.33 ; 15075.96,10482.13 ccw(c15062,10514.63) 15084.49,10487.33 ; 15075.96,10482.13 ccw(c15062,10514.63) 15084.49,10487.33 ; 15075.96,10482.13 ccw(c15062,10514.63) 15084.49,10487.33 ; 15075.96,10482.13 ccw(c15062,10514.63) 15084.49,10487.33 ; 15075.96,10482.13 ccw(c15062,10514.63) 15084.49,10487.33 ; 15075.96,10482.13 ccw(c15062,10514.63) 15084.49,10487.33 ; 15075.96,10482.13 ccw(c15062,10514.63) 15084.49,10487.33 ; 15075.96,10482.13 ccw(c15062,10514.63) 15084.49,10487.33 ; 15075.96,10482.13 ccw(c15062,10514.63) 15084.49,10487.33 ; 15084.49,10487.33 15105.99,10505.05 ; 15105.99,10505.05 ccw(c15089.85,10524.63) 15106.8,10505.74 ; 15105.99,10505.05 ccw(c15089.85,10524.63) 15106.8,10505.74 ; 15105.99,10505.05 ccw(c15089.85,10524.63) 15106.8,10505.74 ; 15105.99,10505.05 ccw(c15089.85,10524.63) 15106.8,10505.74 ; 15105.99,10505.05 ccw(c15089.85,10524.63) 15106.8,10505.74 ; 15105.99,10505.05 ccw(c15089.85,10524.63) 15106.8,10505.74 ; 15105.99,10505.05 ccw(c15089.85,10524.63) 15106.8,10505.74 ; 15105.99,10505.05 ccw(c15089.85,10524.63) 15106.8,10505.74 ; 15105.99,10505.05 ccw(c15089.85,10524.63) 15106.8,10505.74 ; 15105.99,10505.05 ccw(c15089.85,10524.63) 15106.8,10505.74 ; 15105.99,10505.05 ccw(c15089.85,10524.63) 15106.8,10505.74 ; 15105.99,10505.05 ccw(c15089.85,10524.63) 15106.8,10505.74 ; 15105.99,10505.05 ccw(c15089.85,10524.63) 15106.8,10505.74 ; 15105.99,10505.05 ccw(c15089.85,10524.63) 15106.8,10505.74 ; 15105.99,10505.05 ccw(c15089.85,10524.63) 15106.8,10505.74 ; 15105.99,10505.05 ccw(c15089.85,10524.63) 15106.8,10505.74
  Bottom 6+gnd w5: v1@14867.88,9709.56 U4.22@14867.88,9771.4
AA11: IC2.57 U3.35 U4.35 | length 1197.8
  Top Layer 1 w5: U3.35@14930.87,9771.4 v1@14930.87,9833.49 ; IC2.57@15179.12,10461.87 v1@15179.06,10514.16
  Layer 3 w5: v1(14931.12,9833.49) 14931.12,10145.64 ; 14931.12,10195.56 14931.12,10293.63 v1(14930.63,10294.12) 14930.63,10378.65 ; v1(15178.83,10514.39) 15088.14,10465.82 cw(c15062,10514.63) 15083.87,10463.76 15011.72,10432.77 ; 14929.66,10149.12 cw(c14926.12,10145.59) 14931.12,10145.68 ; 14929.66,10149.12 cw(c14926.12,10145.59) 14931.12,10145.68 ; 14929.66,10149.12 cw(c14926.12,10145.59) 14931.12,10145.68 ; 14929.66,10149.12 cw(c14926.12,10145.59) 14931.12,10145.68 ; 14929.66,10149.12 cw(c14926.12,10145.59) 14931.12,10145.68 ; 14929.66,10149.12 cw(c14926.12,10145.59) 14931.12,10145.68 ; 14929.66,10149.12 cw(c14926.12,10145.59) 14931.12,10145.68 ; 14929.66,10149.12 cw(c14926.12,10145.59) 14931.12,10145.68 ; 14929.66,10149.12 cw(c14926.12,10145.59) 14931.12,10145.68 ; 14929.66,10149.12 cw(c14926.12,10145.59) 14931.12,10145.68 ; 14929.66,10149.12 cw(c14926.12,10145.59) 14931.12,10145.68 ; 14929.66,10149.12 cw(c14926.12,10145.59) 14931.12,10145.68 ; 14929.66,10149.12 cw(c14926.12,10145.59) 14931.12,10145.68 ; 14929.66,10149.12 cw(c14926.12,10145.59) 14931.12,10145.68 ; 14929.66,10149.12 cw(c14926.12,10145.59) 14931.12,10145.68 ; 14929.66,10149.12 cw(c14926.12,10145.59) 14931.12,10145.68 ; 14929.66,10149.12 14919.73,10159.1 cw(c14930.63,10169.94) 14919.1,10180.12 14929.86,10192.29 ; 14929.86,10192.29 ccw(c14926.12,10195.6) 14931.12,10195.51 ; 14929.86,10192.29 ccw(c14926.12,10195.6) 14931.12,10195.51 ; 14929.86,10192.29 ccw(c14926.12,10195.6) 14931.12,10195.51 ; 14929.86,10192.29 ccw(c14926.12,10195.6) 14931.12,10195.51 ; 14929.86,10192.29 ccw(c14926.12,10195.6) 14931.12,10195.51 ; 14929.86,10192.29 ccw(c14926.12,10195.6) 14931.12,10195.51 ; 14929.86,10192.29 ccw(c14926.12,10195.6) 14931.12,10195.51 ; 14929.86,10192.29 ccw(c14926.12,10195.6) 14931.12,10195.51 ; 14929.86,10192.29 ccw(c14926.12,10195.6) 14931.12,10195.51 ; 14929.86,10192.29 ccw(c14926.12,10195.6) 14931.12,10195.51 ; 14929.86,10192.29 ccw(c14926.12,10195.6) 14931.12,10195.51 ; 14929.86,10192.29 ccw(c14926.12,10195.6) 14931.12,10195.51 ; 14929.86,10192.29 ccw(c14926.12,10195.6) 14931.12,10195.51 ; 14929.86,10192.29 ccw(c14926.12,10195.6) 14931.12,10195.51 ; 14929.86,10192.29 ccw(c14926.12,10195.6) 14931.12,10195.51 ; 14929.86,10192.29 ccw(c14926.12,10195.6) 14931.12,10195.51 ; 14930.63,10378.65 cw(c14935.63,10378.65) 14932.07,10382.17 ; 14930.63,10378.65 cw(c14935.63,10378.65) 14932.07,10382.17 ; 14930.63,10378.65 cw(c14935.63,10378.65) 14932.07,10382.17 ; 14930.63,10378.65 cw(c14935.63,10378.65) 14932.07,10382.17 ; 14930.63,10378.65 cw(c14935.63,10378.65) 14932.07,10382.17 ; 14930.63,10378.65 cw(c14935.63,10378.65) 14932.07,10382.17 ; 14930.63,10378.65 cw(c14935.63,10378.65) 14932.07,10382.17 ; 14930.63,10378.65 cw(c14935.63,10378.65) 14932.07,10382.17 ; 14930.63,10378.65 cw(c14935.63,10378.65) 14932.07,10382.17 ; 14930.63,10378.65 cw(c14935.63,10378.65) 14932.07,10382.17 ; 14930.63,10378.65 cw(c14935.63,10378.65) 14932.07,10382.17 ; 14930.63,10378.65 cw(c14935.63,10378.65) 14932.07,10382.17 ; 14930.63,10378.65 cw(c14935.63,10378.65) 14932.07,10382.17 ; 14930.63,10378.65 cw(c14935.63,10378.65) 14932.07,10382.17 ; 14930.63,10378.65 cw(c14935.63,10378.65) 14932.07,10382.17 ; 14930.63,10378.65 cw(c14935.63,10378.65) 14932.07,10382.17 ; 14932.07,10382.17 14956.56,10406.65 cw(c14967.12,10396.01) 14960.91,10409.66 15011.08,10432.48 ; 15011.08,10432.48 cw(c15021.64,10409.41) 15011.72,10432.77 ; 15011.08,10432.48 cw(c15021.64,10409.41) 15011.72,10432.77 ; 15011.08,10432.48 cw(c15021.64,10409.41) 15011.72,10432.77 ; 15011.08,10432.48 cw(c15021.64,10409.41) 15011.72,10432.77 ; 15011.08,10432.48 cw(c15021.64,10409.41) 15011.72,10432.77 ; 15011.08,10432.48 cw(c15021.64,10409.41) 15011.72,10432.77 ; 15011.08,10432.48 cw(c15021.64,10409.41) 15011.72,10432.77 ; 15011.08,10432.48 cw(c15021.64,10409.41) 15011.72,10432.77 ; 15011.08,10432.48 cw(c15021.64,10409.41) 15011.72,10432.77 ; 15011.08,10432.48 cw(c15021.64,10409.41) 15011.72,10432.77 ; 15011.08,10432.48 cw(c15021.64,10409.41) 15011.72,10432.77 ; 15011.08,10432.48 cw(c15021.64,10409.41) 15011.72,10432.77 ; 15011.08,10432.48 cw(c15021.64,10409.41) 15011.72,10432.77 ; 15011.08,10432.48 cw(c15021.64,10409.41) 15011.72,10432.77 ; 15011.08,10432.48 cw(c15021.64,10409.41) 15011.72,10432.77 ; 15011.08,10432.48 cw(c15021.64,10409.41) 15011.72,10432.77
  Bottom 6+gnd w5: U4.35@14930.87,10232.03 v1@14930.87,10293.87
ADC3: IC1.40 J15.3 | length 2624.7
  Top Layer 1 w5: IC1.40@16152.72,10466.06 16152.72,10513.38 16216.73,10577.4 16276.73,10577.4 16338.15,10638.82 v1(16338.15,10653.82) ; J15.3@17832.68,12083.86 17835.12,12081.42 v1(17835.12,11879.38)
  Layer 3 w5: v1(16338.15,10653.82) 16349.97,10635.49 ccw(c16362.89,10643.82) 16377.12,10637.99 16379.41,10643.59 cw(c16393.64,10637.76) 16393.2,10653.13 16417.96,10653.84 ccw(c16417.81,10658.84) 16421.33,10655.28 16780.39,11014.34 16780.39,11045.72 16768.49,11057.62 16768.49,11066.26 16764.86,11069.89 16764.86,11131.86 16865.84,11232.83 16911.08,11232.83 17054.97,11376.72 17054.97,11377.1 17487.87,11810 17765.73,11810 v1(17835.12,11879.38)
ADC4: IC1.41 J16.3 | length 2461.6
  Top Layer 1 w5: IC1.41@16172.4,10466.06 16172.42,10503.18 16170.82,10504.78 16170.82,10517.35 16217.71,10564.23 16283.31,10564.23 v1(16362.89,10643.82) ; J16.3@17712.56,12085.08 17720,12077.64 v1(17720,11879.42)
  Layer 3 w5: v1(16362.89,10643.82) 16376.36,10656.34 cw(c16393.64,10637.76) 16392.19,10663.1 16411.76,10664.22 ccw(c16411.47,10669.21) 16414.99,10665.66 16770.39,11021.06 16770.39,11041.58 16758.49,11053.48 16758.49,11062.12 16754.86,11065.75 16754.86,11136 16861.69,11242.83 16906.93,11242.83 17043.15,11379.05 17043.15,11379.43 17483.72,11820 17654.4,11820 17704.27,11869.87 17707.81,11869.87 17717.35,11879.42 v1(17720,11879.42)
ADC5: IC1.44 J17.3 | length 2639.1
  Top Layer 1 w5: IC1.44@16231.57,10466.17 16231.57,10533.33 16250.93,10552.7 16302.03,10552.7 16377.73,10628.4 16381.36,10628.4 16390.73,10637.76 v1(16393.64,10637.76) ; J17.3@17947.68,12083.86 17950.12,12081.42 v1(17950.12,11879.38)
  Layer 3 w5: v1(16393.64,10637.76) 16417.16,10638.82 ccw(c16416.94,10643.82) 16420.47,10640.28 16790.39,11010.2 16790.39,11049.86 16778.49,11061.76 16778.49,11070.4 16774.86,11074.03 16774.86,11127.72 16869.98,11222.83 16915.22,11222.83 17064.97,11372.58 17064.97,11372.96 17492.01,11800 17870.73,11800 v1(17950.12,11879.38)
ADC6: IC1.45 J18.3 | length 2742.3
  Top Layer 1 w5: IC1.45@16251.14,10466.06 16251.14,10523.99 16267.98,10540.83 16312.44,10540.83 16390.43,10618.82 v1(16413.15,10618.82) ; J18.3@18067.68,12083.86 18069.01,12082.53 v1(18069.01,11864.01)
  Layer 3 w5: v1(16413.15,10618.82) 16800.39,11006.06 16800.39,11054 16788.49,11065.9 16788.49,11074.55 16784.86,11078.18 16784.86,11123.57 16874.12,11212.83 16919.36,11212.83 17074.97,11368.44 17074.97,11368.82 17496.15,11790 17995,11790 v1(18069.01,11864.01)
ADC_ON: IC1.137 R39.1 R51.2 TP10.1 | length 6195.2
  Top Layer 1 w5: v1(16263.15,11198.82) 16250.11,11211.86 16246.65,11211.86 16237.64,11220.87 16237.64,11237.47 16240.38,11240.21 16240.38,11252.94 16231.46,11261.87 IC1.137@16231.46,11311.57 16231.46,11347.13 16263.93,11379.6 16264.63,11379.6 16273.85,11388.82 TP10.1@16283.15,11388.82 ; v1(20207.88,12542.24) 20240.01,12542.24 20240.47,12542.7
  Top Layer 1 w10: 20240.47,12542.7 20587.73,12542.7 20702.6,12657.57 20815.11,12657.57 20867.69,12605 20964.65,12605 20974.02,12614.37 R51.2@20974.02,12639.37 R39.1@21032.83,12639.37
  Unused w5: v1(16263.15,11198.82) 16286.77,11175.19 ccw(c16290.3,11178.74) 16290.3,11173.74 16311.05,11173.74 cw(c16311.05,11168.74) 16314.56,11172.3 16321.25,11165.71 ccw(c16324.75,11169.27) 16324.75,11164.27 16589.48,11164.27 cw(c16589.48,11159.27) 16593,11162.83 16605.55,11150.27 ccw(c16609.07,11153.82) 16609.07,11148.82 16670.82,11148.82 cw(c16670.82,11143.82) 16674.36,11147.35 16788.53,11033.18 ccw(c16792.05,11036.74) 16792.05,11031.74 16822.03,11031.74 cw(c16822.03,11026.74) 16825.55,11030.29 16848.83,11007.28 ccw(c16852.35,11010.83) 16852.35,11005.83 16957.08,11005.83 ccw(c16957.08,11010.83) 16960.6,11007.28 17039.7,11086.37 ccw(c17036.15,11089.89) 17041.15,11089.89 17041.15,11187.33 cw(c17046.15,11187.33) 17042.6,11190.85 17383.9,11532.15 cw(c17387.42,11528.6) 17387.42,11533.6 18835.14,11533.6 ccw(c18835.14,11538.6) 18838.66,11535.05 18985.98,11682.37 cw(c18989.5,11678.82) 18989.5,11683.82 19440.36,11683.82 ccw(c19440.36,11688.82) 19443.88,11685.27 19515.6,11756.99 cw(c19519.12,11753.44) 19519.12,11758.44 19898.8,11758.44 ccw(c19898.8,11763.44) 19902.32,11759.89 20020.78,11878.35 ccw(c20017.23,11881.87) 20022.23,11881.87 20022.23,12426.79 cw(c20027.23,12426.79) 20023.68,12430.31 20125.54,12532.18 cw(c20129.06,12528.63) 20129.06,12533.63 20156.19,12533.63 ccw(c20156.19,12538.63) 20159.71,12535.08 20165.42,12540.79 cw(c20168.94,12537.24) 20168.94,12542.24 v1(20207.88,12542.24)
ADC_VBAT: IC1.37 R50.2 | length 7159.1
  Top Layer 1 w5: IC1.37@16093.66,10472.3 16093.66,10517.58 v1(16177.28,10601.21) ; v1(20187.63,12523.86) 20239.74,12523.86 20239.89,12524.01
  Top Layer 1 w10: 20239.89,12524.01 20594.3,12524.01 20707.87,12637.57 20806.83,12637.57 20859.4,12585 20974.65,12585 20993.98,12604.34 21189.34,12604.34 21195.2,12610.19 R50.2@21195.2,12639.37
  Unused w5: v1(16177.28,10601.21) 16048.7,10601.21 cw(c16048.7,10606.21) 16045.18,10602.66 16029.61,10618.22 cw(c16033.15,10621.76) 16028.15,10621.76 16028.15,11061.75 cw(c16033.15,11061.75) 16029.6,11065.27 16073.99,11109.66 cw(c16077.51,11106.1) 16077.51,11111.1 16105.1,11111.1 cw(c16105.1,11106.1) 16108.62,11109.66 16115,11103.27 ccw(c16118.51,11106.83) 16118.51,11101.83 16234.09,11101.83 ccw(c16234.09,11106.83) 16237.61,11103.28 16287.16,11152.83 cw(c16290.68,11149.27) 16290.68,11154.27 16585.33,11154.27 cw(c16585.33,11149.27) 16588.85,11152.83 16601.41,11140.27 ccw(c16604.93,11143.82) 16604.93,11138.82 16666.68,11138.82 cw(c16666.68,11133.82) 16670.22,11137.35 16784.39,11023.18 ccw(c16787.91,11026.74) 16787.91,11021.74 16816.04,11021.74 cw(c16816.04,11016.74) 16819.56,11020.29 16842.84,10997.28 ccw(c16846.36,11000.83) 16846.36,10995.83 16961.22,10995.83 ccw(c16961.22,11000.83) 16964.74,10997.28 17049.7,11082.23 ccw(c17046.15,11085.75) 17051.15,11085.75 17051.15,11183.19 cw(c17056.15,11183.19) 17052.6,11186.71 17388.04,11522.15 cw(c17391.56,11518.6) 17391.56,11523.6 18839.28,11523.6 ccw(c18839.28,11528.6) 18842.8,11525.05 18990.12,11672.37 cw(c18993.64,11668.82) 18993.64,11673.82 19444.5,11673.82 ccw(c19444.5,11678.82) 19448.02,11675.27 19519.74,11746.99 cw(c19523.26,11743.44) 19523.26,11748.44 19902.94,11748.44 ccw(c19902.94,11753.44) 19906.46,11749.89 20030.78,11874.21 ccw(c20027.23,11877.73) 20032.23,11877.73 20032.23,12422.65 cw(c20037.23,12422.65) 20033.68,12426.17 20129.68,12522.18 cw(c20133.2,12518.63) 20133.2,12523.63 20156.19,12523.63 v1(20187.63,12523.86)
ADC_VOL: IC1.42 | length 2424.9
  Top Layer 1 w5: v1(16186.2,10510.94) 16186.2,10508.6 16192.2,10502.6 16192.2,10466.17 IC1.42@16192.09,10466.06
  Unused w5: v1(15915,8530) 15946.79,8701.12 cw(c15981.58,8694.69) 15954.14,8717.02 15999.04,8772.22 ccw(c15995.15,8775.36) 16000.15,8775.36 16000.15,9276.93 ccw(c15995.15,9276.93) 15998.68,9280.46 15733.6,9545.55 cw(c15737.15,9549.07) 15732.15,9549.07 15732.15,10187.75 cw(c15737.15,10187.75) 15733.6,10191.27 15859.88,10317.55 cw(c15863.4,10314) 15863.4,10319 15899.1,10319 ccw(c15899.1,10324) 15902.62,10320.45 16091.66,10509.49 cw(c16095.18,10505.94) 16095.18,10510.94 v1(16186.2,10510.94)
ADC_VUSB: IC1.27 R11.1 R19.2 | length 6662.2
  Top Layer 1 w5: IC1.27@16015.47,10721.42 16015.5,10721.46 16066.16,10721.46 v1(16066.2,10721.42) ; v1(20208.62,12505.76) 20209.06,12505.32 20243.39,12505.32
  Top Layer 1 w10: 20243.39,12505.32 20605.16,12505.32 20708.63,12608.79 v2(20729.65,12608.79) ; R11.1@20439.65,12660 20469.65,12660 20487.15,12677.5 v2(20487.15,12710) R19.2@20529.65,12710
  Unused w5: v1(16066.2,10721.42) 16045.9,10741.72 cw(c16049.45,10745.24) 16044.45,10745.24 16044.45,11063.91 cw(c16049.45,11063.91) 16045.9,11067.43 16078.13,11099.66 cw(c16081.65,11096.1) 16081.65,11101.1 16100.87,11101.1 cw(c16100.87,11096.1) 16104.38,11099.66 16110.87,11093.26 ccw(c16114.37,11096.83) 16114.37,11091.83 16241,11091.83 ccw(c16241,11096.83) 16244.52,11093.28 16294.07,11142.83 cw(c16297.59,11139.27) 16297.59,11144.27 16580.62,11144.27 cw(c16580.62,11139.27) 16584.14,11142.83 16596.7,11130.27 ccw(c16600.22,11133.82) 16600.22,11128.82 16662.54,11128.82 cw(c16662.54,11123.82) 16666.08,11127.35 16780.25,11013.18 ccw(c16783.76,11016.74) 16783.76,11011.74 16811.9,11011.74 cw(c16811.9,11006.74) 16815.42,11010.29 16838.7,10987.28 ccw(c16842.22,10990.83) 16842.22,10985.83 16965.37,10985.83 ccw(c16965.37,10990.83) 16968.89,10987.28 17059.7,11078.09 ccw(c17056.15,11081.61) 17061.15,11081.61 17061.15,11179.04 cw(c17066.15,11179.04) 17062.6,11182.56 17392.19,11512.15 cw(c17395.71,11508.6) 17395.71,11513.6 18843.42,11513.6 ccw(c18843.42,11518.6) 18846.94,11515.05 18994.26,11662.37 cw(c18997.78,11658.82) 18997.78,11663.82 19448.64,11663.82 ccw(c19448.64,11668.82) 19452.16,11665.27 19518.51,11731.62 cw(c19522.03,11728.07) 19522.03,11733.07 19909.31,11733.07 ccw(c19909.31,11738.07) 19912.83,11734.52 20040.78,11862.47 ccw(c20037.23,11865.99) 20042.23,11865.99 20042.23,12418.51 cw(c20047.23,12418.51) 20043.68,12422.03 20125.96,12504.31 cw(c20129.48,12500.76) 20129.48,12505.76 v1(20208.62,12505.76)
  Bottom 6+gnd w10: v2(20487.15,12710) 20587.15,12610 20728.44,12610 v2(20729.65,12608.79)
AUDIO_BOOT: IC1.3 R106.1 | length 2886.2
  Top Layer 1 w5: R106.1@14698.15,11393.54 14698.15,11348.82 v1(14723.15,11323.82) ; IC1.3@16015.39,11193.94 16085.85,11193.94 16125.97,11153.82 16126.41,11153.82 16131.84,11148.39 16137.7,11148.39 16142.18,11152.87 16159.1,11152.87 16173.15,11138.82 v1(16177.59,11138.82)
  Unused w5: v1(14723.15,11323.82) 14723.15,11210.89 ccw(c14728.15,11210.89) 14724.6,11207.37 14821.72,11110.25 ccw(c14825.24,11113.8) 14825.24,11108.8 14969.98,11108.8 cw(c14969.98,11103.8) 14973.5,11107.36 15059.41,11021.45 ccw(c15062.93,11025) 15062.93,11020 15417.93,11020 cw(c15417.93,11015) 15421.45,11018.55 15432.07,11007.93 cw(c15428.52,11004.41) 15433.52,11004.41 15433.52,10922.47 ccw(c15438.52,10922.47) 15434.96,10918.97 15443.56,10910.27 cw(c15440,10906.76) 15445,10906.76 15445,10719.9 ccw(c15450,10719.9) 15446.45,10716.37 15481.33,10681.5 cw(c15477.78,10677.98) 15482.78,10677.98 15482.78,10635.65 ccw(c15487.78,10635.65) 15484.23,10632.13 15501.98,10614.38 cw(c15498.43,10610.85) 15503.43,10610.86 15503.43,10603.82 ccw(c15508.43,10603.82) 15508.43,10598.82 15948.14,10598.82 ccw(c15948.14,10603.82) 15951.66,10600.27 16004.81,10653.42 ccw(c16001.26,10656.94) 16006.26,10656.94 16006.26,11084.86 cw(c16011.26,11084.86) 16007.71,11088.38 16094.34,11175.01 cw(c16097.86,11171.46) 16097.86,11176.46 16190.18,11176.46 cw(c16190.18,11171.46) 16193.72,11174.99 16216.69,11152.02 cw(c16213.15,11148.49) 16218.15,11148.49 16218.15,11139.9 cw(c16213.15,11139.9) 16216.7,11136.38 16210.59,11130.27 cw(c16207.07,11133.82) 16207.07,11128.82 16192.57,11128.82 cw(c16192.57,11133.82) 16189.59,11129.81 v1(16177.59,11138.82)
AUDIO_NRST: C8.2 IC2.25 J20.B5 Q2.3 R6.2 | length 6849.5
  Top Layer 1 w5: Q2.3@14443.15,10629.45 14482.52,10629.45 14502.81,10609.16 14578.15,10609.16 14584.41,10602.9 14584.41,10580.72 R6.2@14585.5,10579.63 ; C8.2@14574.91,10524.63 14574.91,10569.04 R6.2@14585.5,10579.63 ; IC2.25@14707.15,10756.68 14661.96,10756.68 14646.54,10741.26 v1(14646.54,10695.26) 14646.54,10620.54 14611.96,10585.96 14591.83,10585.96 R6.2@14585.5,10579.63
  Unused w5: v1(14883.15,11253.82) 14971.7,11342.37 cw(c14975.22,11338.82) 14975.22,11343.82 16501.25,11343.82 cw(c16501.25,11338.82) 16504.77,11342.37 16566.08,11281.06 cw(c16562.53,11277.54) 16567.53,11277.54 16567.53,11259.94 ccw(c16572.53,11259.94) 16568.98,11256.42 16575.08,11250.31 ccw(c16578.6,11253.86) 16578.6,11248.86 16587.2,11248.86 ccw(c16587.2,11253.86) 16590.72,11250.31 16594.87,11254.46 cw(c16598.39,11250.91) 16598.39,11255.91 16606.07,11255.91 cw(c16606.07,11250.91) 16609.59,11254.47 16630.26,11234.03 ccw(c16633.78,11237.58) 16633.78,11232.58 16677.67,11232.58 cw(c16677.67,11227.58) 16681.21,11231.12 16794.68,11117.64 ccw(c16798.19,11121.2) 16798.19,11116.2 16839.05,11116.2 cw(c16839.05,11111.2) 16842.57,11114.75 16876.87,11080.45 ccw(c16880.4,11084) 16880.4,11079 16880.57,11079 ccw(c16880.57,11084) 16884.09,11080.45 16935.17,11131.52 cw(c16938.69,11127.97) 16938.69,11132.97 16950.23,11132.97 ccw(c16950.23,11137.97) 16953.75,11134.42 16973.39,11154.06 ccw(c16969.84,11157.58) 16974.84,11157.58 16974.84,11292.05 cw(c16979.84,11292.05) 16976.29,11295.57 17309.27,11628.55 cw(c17312.79,11625) 17312.79,11630 18397.93,11630 ccw(c18397.93,11635) 18401.45,11631.45 18630,11860 18630,12727.28 18761.87,12859.15 ccw(c18758.32,12862.67) 18763.32,12862.67 18763.32,12921.75 cw(c18768.32,12921.75) 18764.77,12925.27 18781.48,12941.98 cw(c18785,12938.43) 18785,12943.43 18827.14,12943.43 cw(c18827.14,12938.43) 18830.66,12941.98 18840.95,12931.7 cw(c18837.4,12928.18) 18842.4,12928.18 18842.4,12925.76 ccw(c18847.4,12925.76) 18843.85,12922.24 18849.95,12916.13 ccw(c18853.47,12919.68) 18853.47,12914.68 18862.07,12914.68 ccw(c18862.07,12919.68) 18865.59,12916.13 18879.51,12930.05 v1(18894.27,12930.05)
  Layer 3 w5: v1(14646.54,10695.26) 14688.15,10736.86 14688.15,11113.82 14829.48,11255.14 14829.48,11261 14837.29,11268.81 14839.17,11268.81 14843.04,11272.68 14864.29,11272.68 v1(14883.15,11253.82)
  Bottom 6+gnd w5: v1(18894.27,12930.05) 18894.27,12932.96 18896.71,12935.4 J20.B5@18896.71,12978.4
AUDIO_RST: IC1.2 R107.1 | length 2604.7
  Top Layer 1 w5: R107.1@14420.51,10768.82 14420.51,10797.95 v1(14420.85,10798.29) ; IC1.2@16015.39,11213.62 16080.31,11213.62 16130.11,11163.82 16183.15,11163.82 v1(16202.78,11144.19)
  Unused w5: v1(14778.15,10773.82) 15289.68,10773.82 cw(c15289.68,10768.82) 15293.21,10772.35 15475.3,10590.26 ccw(c15478.82,10593.82) 15478.82,10588.82 15968.14,10588.82 ccw(c15968.14,10593.82) 15971.66,10590.27 16014.81,10633.42 ccw(c16011.26,10636.94) 16016.26,10636.94 16016.26,11064.86 cw(c16021.26,11064.86) 16017.71,11068.38 16103.36,11154.03 cw(c16106.88,11150.48) 16106.88,11155.48 16186.51,11155.48 cw(c16186.51,11150.48) 16189.57,11154.43 v1(16202.78,11144.19)
  Bottom 6+gnd w5: v1(14420.85,10798.29) 14617.43,10798.29 14641.9,10773.82 v1(14778.15,10773.82)
AUDIO_SWD.CLK_1: IC2.109 J15.1 J20.B8 | length 5094.3
  Top Layer 1 w5: IC2.109@15474.4,11307.38 15473.95,11307.83 15473.95,11405.04 15484.96,11416.05 v1(15500.64,11416.05) ; J15.1@17777.56,12083.86 17780,12081.42 v1(17780,11879.38)
  Unused w5: v1(17780,11879.38) 17793.92,11865.46 ccw(c17797.44,11869.01) 17797.44,11864.01 17855.81,11864.01 ccw(c17855.81,11869.01) 17859.33,11865.46 17887.18,11893.31 cw(c17890.7,11889.76) 17890.7,11894.76 17927.54,11894.76 ccw(c17927.54,11899.76) 17931.06,11896.21 17938.16,11903.31 cw(c17941.68,11899.76) 17941.68,11904.76 18023.44,11904.76 cw(c18023.44,11899.76) 18026.96,11903.31 18049.44,11880.83 ccw(c18052.96,11884.38) 18052.96,11879.38 18073.31,11879.38 cw(c18073.31,11874.38) 18076.83,11877.93 18082.93,11871.83 cw(c18079.38,11868.31) 18084.38,11868.31 18084.38,11867.69 ccw(c18089.38,11867.69) 18085.83,11864.17 18107.29,11842.71 ccw(c18110.81,11846.26) 18110.81,11841.26 18545.1,11841.26 ccw(c18545.1,11846.26) 18548.62,11842.71 18590,11884.09 18590,12743.85 18687.94,12841.79 ccw(c18684.39,12845.31) 18689.39,12845.31 18689.39,12946.82 cw(c18694.39,12946.82) 18690.84,12950.34 18754.97,13014.47 ccw(c18751.42,13017.99) 18756.3,13016.91 v1(18758.48,13026.75)
  Bottom 6+gnd w5: v1(15500.64,11416.05) 15500.64,11388.99 15492.8,11381.15 15492.8,11356.99 15495.97,11353.82 16636.91,11353.82 16702.84,11287.89 16832.64,11287.89 17384.74,11840 17740.62,11840 v1(17780,11879.38) ; J20.B8@18758.91,12978.4 v1@18758.91,13026.32
AUDIO_SWD.IO_1: IC2.105 J16.1 J20.B7 | length 5402.8
  Top Layer 1 w5: v1(15496.48,11170.26) 15496.58,11170.16 15552.57,11170.16 IC2.105@15552.67,11170.06 ; J16.1@17659.88,12082.64 17675,12067.52 v1(17675,11895)
  Unused w5: v1(17675,11895) 17688.55,11908.55 cw(c17692.07,11905) 17692.07,11910 17777.93,11910 ccw(c17777.93,11927.25) 17790.08,11915 18067.07,11915 18130.08,11852.71 ccw(c18133.6,11856.26) 18133.6,11851.26 18540.96,11851.26 ccw(c18540.96,11856.26) 18544.48,11852.71 18580,11888.23 18580,12747.99 18677.94,12845.93 ccw(c18674.39,12849.45) 18679.39,12849.45 18679.39,12950.96 cw(c18684.39,12950.96) 18680.84,12954.48 18740.9,13014.54 ccw(c18737.35,13018.06) 18742.35,13018.06 18742.35,13030.3 cw(c18747.35,13030.3) 18743.8,13033.82 18753.59,13043.61 cw(c18757.11,13040.05) 18757.11,13045.05 18777.48,13045.05 cw(c18777.48,13040.05) 18781.01,13043.59 v1(18797.85,13026.75)
  Bottom 6+gnd w5: v1(15496.48,11170.26) 15496.48,11327.15 15512.78,11343.44 16633.14,11343.44 16698.69,11277.89 16836.78,11277.89 17383.89,11825 17747.36,11825 17795.37,11873.02 17795.37,11885.75 17786.33,11894.8 v1@17675.2,11894.8 ; J20.B7@18798.28,12978.4 v1@18798.28,13026.32
AUDIO_SWD.SWO_1: IC2.133 J20.B6 | length 5431.9
  Top Layer 1 w5: IC2.133@15001.96,11307.38 15001.96,11358 v1(15003.15,11359.19)
  Unused w5: v1(15003.15,11359.19) 15026.27,11359.19 cw(c15026.27,11354.19) 15029.78,11357.75 15032.33,11355.24 ccw(c15035.82,11358.82) 15035.82,11353.82 16516.55,11353.82 cw(c16516.55,11348.82) 16520.07,11352.37 16605.08,11267.36 ccw(c16608.6,11270.91) 16608.55,11265.91 16610.21,11265.91 cw(c16610.21,11260.91) 16613.6,11264.59 16616.47,11261.94 cw(c16606.31,11250.91) 16616.87,11261.56 16634.4,11244.03 ccw(c16637.92,11247.58) 16637.92,11242.58 16682.32,11242.58 cw(c16682.32,11237.58) 16685.85,11241.12 16796.71,11130.26 ccw(c16800.22,11133.82) 16800.22,11128.82 16859.52,11128.82 ccw(c16859.52,11133.82) 16863.04,11130.27 16902.47,11169.7 cw(c16905.99,11166.15) 16905.99,11171.15 16926.36,11171.15 cw(c16926.36,11166.15) 16929.87,11169.71 16937.42,11162.26 ccw(c16940.92,11165.83) 16944.44,11162.28 16961.7,11179.54 ccw(c16958.15,11183.06) 16963.07,11182.18 16964.76,11191.71 ccw(c16959.84,11192.58) 16964.84,11192.58 16964.84,11296.19 cw(c16969.84,11296.19) 16966.29,11299.71 17305.13,11638.55 cw(c17308.65,11635) 17308.65,11640 18393.79,11640 ccw(c18393.79,11645) 18397.31,11641.45 18620,11864.14 18620,12731.42 18751.87,12863.3 ccw(c18748.32,12866.82) 18753.32,12866.82 18753.32,12925.89 cw(c18758.32,12925.89) 18754.77,12929.41 18777.33,12951.98 cw(c18780.85,12948.43) 18780.85,12953.43 18832.33,12953.43 cw(c18832.33,12948.43) 18835.86,12951.96 v1(18857.77,12930.05)
  Bottom 6+gnd w5: v1@18857.34,12930.49 J20.B6@18857.34,12978.4
B_ENC1: IC11_IC101.8 IC15.13 | length 1718.7
  Top Layer 1 w5: IC11_IC101.8@19095.43,11623.82 19167.09,11623.82 19172.09,11618.82 v1(19175,11618.82)
  Top Layer 1 w8: IC15.13@20450,11173.82 v1(20450,11239.66)
  Unused w5: v1(19171.97,11407.3) 19171.97,11390.1 ccw(c19176.97,11390.1) 19173.42,11386.58 19267.97,11292.03 ccw(c19271.49,11295.58) 19271.49,11290.58 19317.19,11290.58 cw(c19317.19,11285.58) 19320.71,11289.14 19362.19,11247.66 ccw(c19365.71,11251.21) 19365.71,11246.21 20416.72,11246.21 cw(c20416.72,11241.21) 20420.23,11244.77 20425.37,11239.63 ccw(c20428.89,11243.18) 20428.89,11238.18 20446.45,11238.18 ccw(c20446.45,11243.18) v1(20450,11239.66)
  Layer 3 w5: v1(19171.97,11407.3) 19171.97,11615.79 v1(19175,11618.82)
B_ENC2: IC11_IC102.8 IC15.4 | length 784.4
  Top Layer 1 w8: IC11_IC102.8@20435,11643.82 v1(20510,11643.82) ; IC15.4@20450,10959.25 v1(20450,11003.54)
  Layer 3 w8: v1(20450,11003.54) 20450,11085 20510,11145 v1(20510,11643.82)
B_ENC3: IC11_IC103.8 IC16.4 | length 1576.8
  Top Layer 1 w8: IC11_IC103.8@19110.43,10043.82 19160.72,10043.82 19447.58,10330.68 20004.8,10330.68 20190,10515.88 20386.65,10515.88 20435.8,10565.02 20441.2,10565.02 20450,10573.82 IC16.4@20450,10591.53
B_ENC4: IC11_IC104.8 IC16.13 | length 865.5
  Top Layer 1 w8: IC11_IC104.8@20435,10043.82 20511.45,10043.82 v1(20512.78,10045.15) ; v1(20450,10760) IC16.13@20450,10806.1
  Layer 3 w8: v1(20450,10760) 20450,10756.87 20466.87,10740 20466.87,10328.13 20475,10320 20475,10115 20513,10077 20513,10045.37 v1(20512.78,10045.15)
B_ENC5: IC11_IC105.8 IC17.13 | length 10601.8
  Top Layer 1 w8: IC11_IC105.8@13425.86,10108.82 v1(13478.15,10108.82) ; v1(20450,10368.82) IC17.13@20450,10426.1
  Layer 2 w8: v1(13403.9,9693.82) 13403.9,10034.57 v1(13478.15,10108.82)
  Unused w5: v1(13403.9,9693.82) 13403.9,8607.93 ccw(c13408.9,8607.93) 13405.35,8604.41 13575.01,8434.75 ccw(c13578.53,8438.3) 13578.53,8433.3 14788.47,8433.3 ccw(c14788.47,8438.3) 14791.99,8434.75 14841.79,8484.55 cw(c14845.31,8481) 14845.31,8486 15404.92,8486 cw(c15404.92,8481) 15408.44,8484.55 15464.47,8428.53 ccw(c15467.99,8432.08) 15467.99,8427.08 17170.29,8427.08 ccw(c17170.29,8432.08) 17173.81,8428.53 17228.35,8483.06 cw(c17231.87,8479.51) 17231.87,8484.51 20003.15,8484.51 ccw(c20003.12,8489.51) v1(20006.36,8485.71) ; v1(20130,10295) 20143.21,10308.21 cw(c20146.73,10304.65) 20146.72,10309.65 20389.12,10310 ccw(c20389.11,10315) 20392.63,10311.45 v1(20450,10368.82)
  Layer 3 w8: v1(20006.36,8485.71) 20006.36,8531.18 19999.77,8537.77 19999.77,9327.71 20109.28,9437.22 20109.28,10231.46 20130,10252.18 v1(20130,10295)